# Allegro board LowPassButterworthTwo.brd
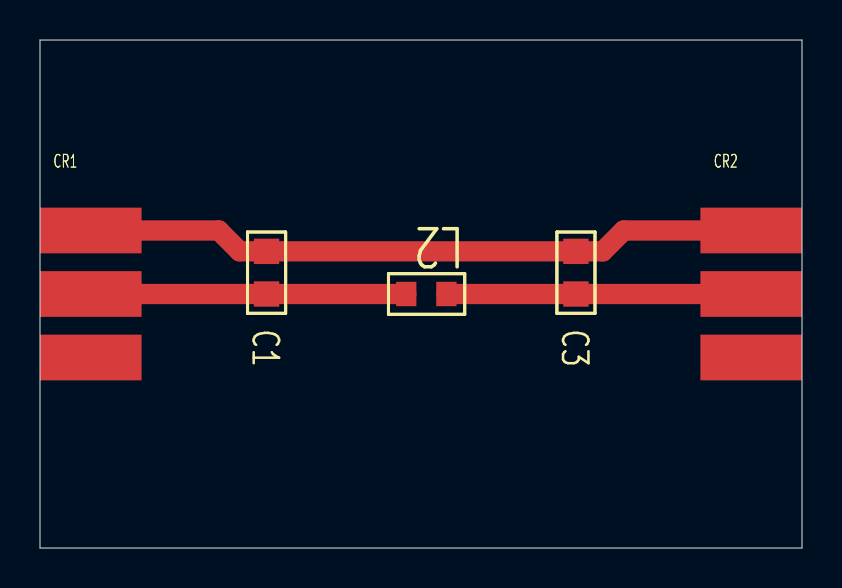
[diagram p0: board, top side]
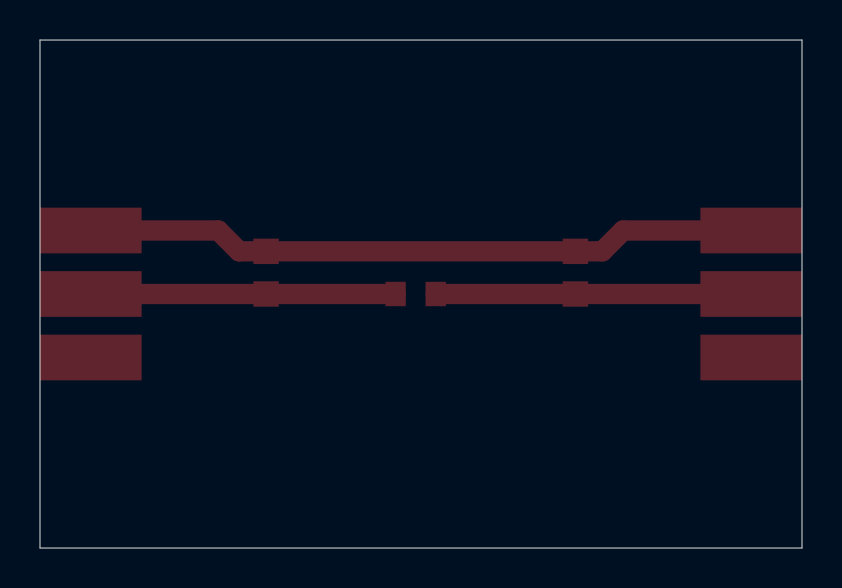
[diagram p1: board, bottom side, seen from below]

Outline 38.1 x 25.4 mm; copper layers: TOP, BOTTOM. Coordinates in mm from the lower left corner of the outline.
Outline path: 0,25.4 38.1,25.4 38.1,0 0,0 0,25.4

## Design rules (mm)
constraint set DEFAULT: min track width 0.305

## Placement (name value [footprint] x y rotation side)
C1  109.8pF  [SMC0805]  11.33 14.83 270 top
C3  109.8pF  [SMC0805]  26.8 14.83 270 top
CR1  COAX RECEPTACLE  [MOLEX_SMA]  0 12.7 0 top
CR2  COAX RECEPTACLE  [MOLEX_SMA]  33.02 12.7 0 top
L2  0.549uH  [SML0805]  20.32 12.7 180 top

## Library data of the parts
C1 C3 = C
CR1 CR2 = COAX RECEPTACLE
L2 = L

## Footprints (pads in the part's own frame, mm; a bottom-side part is the same pattern mirrored in y, then rotated)
MOLEX_SMA
  rect 5.08x2.286 smd: 1(2.54,3.175) 2(2.54,0) 3(2.54,-3.175)
SMC0805
  rect 1.27x1.27 smd: 1(0,0) 2(2.134,0)
SML0805
  rect 1.016x1.219 smd: 1(0,0) 2(2.007,0)

## Nets
0: C1.1 C3.1 CR1.1 CR1.3(SHIELD 2) CR2.1 CR2.3(SHIELD 2)
N02630: C1.2 CR1.2 L2.2
N02662: C3.2 CR2.2 L2.1

## Routing (per net, layer and track width the routed paths; a pad name or vN(x,y) marks a point on that pad's centre or on a via; arc(x,y) is an arc through that point)
0: length 33.9
  TOP w1.016: CR1.1 8.94,15.88 9.98,14.83 C1.1 C3.1 28.14,14.83 29.18,15.88 CR2.1
N02630: length 15.8
  TOP w1.016: L2.2 C1.2 CR1.2
N02662: length 15.2
  TOP w1.016: L2.1 C3.2 CR2.2
